# EAGLE board buttons (EAGLE 6.5.0)
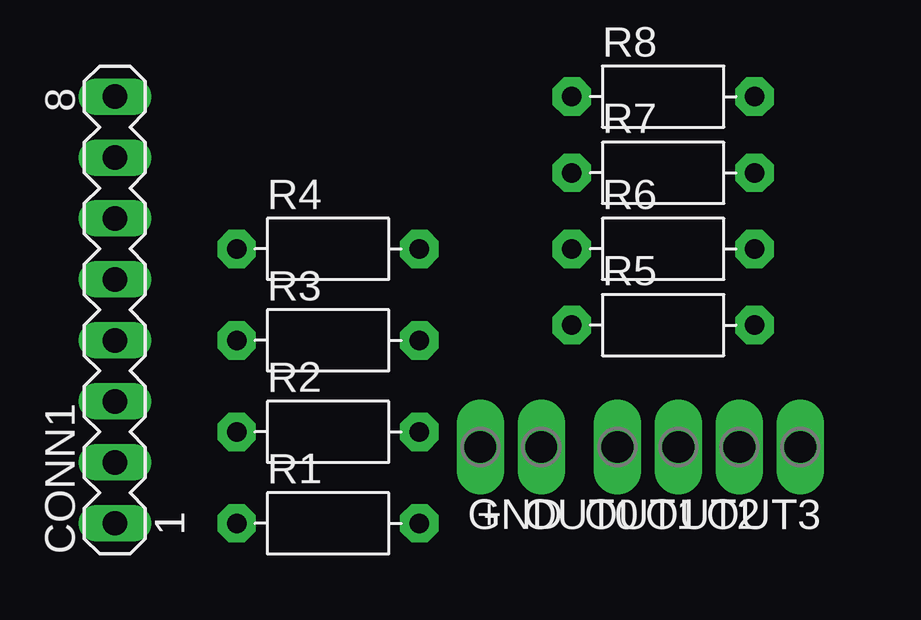
[diagram p0: board, top side]
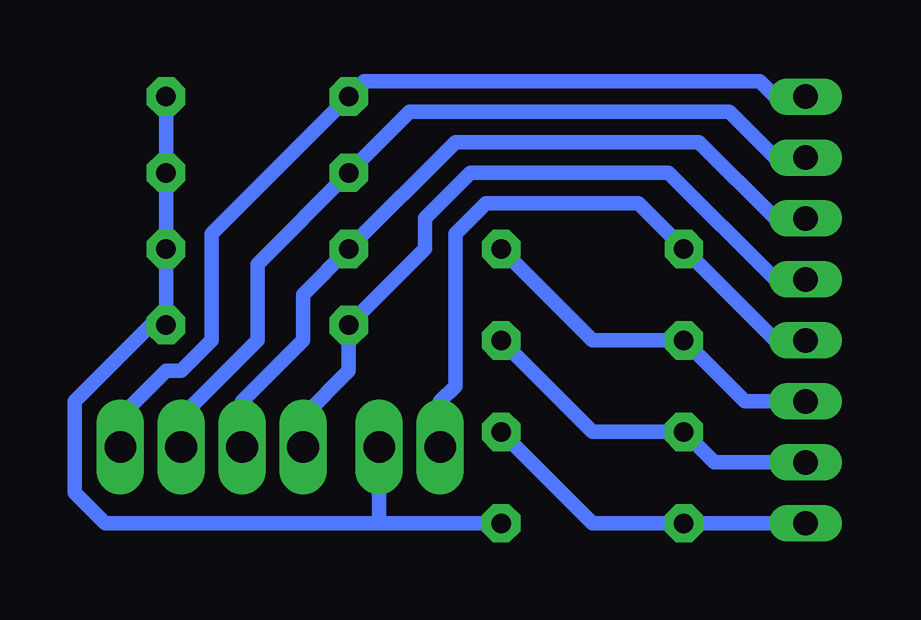
[diagram p1: board, bottom side, seen from below]

No outline drawn. Coordinates in mm, seen from the top.
Copper layers (1*16): Top 0.035mm / dielectric 1.5mm / Bottom 0.035mm
Design rules "default": minimum track width 10mil, minimum drill 24mil, track to track 8mil, track to pad 8mil, pad to pad 8mil, via to via 8mil, smd to smd 8mil, copper to edge 40mil, drill to drill 8mil, minimum pad ring 10mil, minimum via ring 8mil, stop-mask expansion 4mil, vias tented up to drill 0mil, thermal gap 10mil

## Footprints (pad centres in the part's own frame; a part is rotated, then mirrored left to right if it is on the bottom)
P1-13Y = drill 1.321 pad 1.905 long: TP 0,0
MA08-1 = drill 1.016 long: 1 -8.89,0; 2 -6.35,0; 3 -3.81,0; 4 -1.27,0; 5 1.27,0; 6 3.81,0; 7 6.35,0; 8 8.89,0
R-7,5 = drill 0.813 pad 1.6 octagon: 1 -3.81,0; 2 3.81,0

## Placement (x,y rotation side)
+  [P1-13Y]  17.78,5.71 180 top
CONN1  BUTTONS  [MA08-1]  2.54,11.43 90 top
GND  [P1-13Y]  20.32,5.71 180 top
OUT0  [P1-13Y]  23.5,5.71 180 top
OUT1  [P1-13Y]  26.04,5.71 180 top
OUT2  [P1-13Y]  28.57,5.71 180 top
OUT3  [P1-13Y]  31.11,5.71 180 top
R1  10k  [R-7,5]  11.43,2.54 0 top
R2  10k  [R-7,5]  11.43,6.35 0 top
R3  10k  [R-7,5]  11.43,10.16 0 top
R4  10k  [R-7,5]  11.43,13.97 0 top
R5  100k  [R-7,5]  25.4,10.79 0 top
R6  100k  [R-7,5]  25.4,13.97 0 top
R7  100k  [R-7,5]  25.4,17.14 0 top
R8  100k  [R-7,5]  25.4,20.32 0 top

## Library data of the parts
+ GND OUT0 OUT1-OUT3 = testpad
CONN1 = con-lstb
R1-R8 = discrete

## Nets
S$1: CONN1.1 R1.1 R2.2
S$2: CONN1.2 R2.1 R3.2
S$3: CONN1.3 R3.1 R4.2
S$4: +.TP CONN1.4 R4.1
S$6: GND.TP R1.2 R5.2 R6.2 R7.2 R8.2
S$7: CONN1.5 OUT0.TP R5.1
S$8: CONN1.6 OUT1.TP R6.1
S$9: CONN1.7 OUT2.TP R7.1
S$10: CONN1.8 OUT3.TP R8.1

## Tracks (layer width: path | path; a pad name or v marks a point on that pad's centre or on a via)
S$1
  Bottom 0.61: CONN1.1 R1.1 11.43,2.54 R2.2
S$2
  Bottom 0.61: CONN1.2 6.35,5.08 R2.1 11.43,6.35 R3.2
S$3
  Bottom 0.61: CONN1.3 5.08,7.62 R3.1 11.43,10.16 R4.2
S$4
  Bottom 0.61: CONN1.4 3.81,10.16 R4.1 9.53,15.88 15.88,15.88 17.14,14.61 17.14,8.26 17.78,7.62 +.TP
S$6
  Bottom 0.61: GND.TP 20.32,2.54 | 20.32,2.54 R1.2 | R8.2 R7.2 R6.2 R5.2 29.84,10.79 33.02,7.62 33.02,3.81 31.75,2.54 20.32,2.54
S$7
  Bottom 0.61: CONN1.5 3.81,12.7 8.26,17.14 16.51,17.14 18.41,15.24 18.41,13.97 R5.1 21.59,8.89 23.5,6.99 OUT0.TP
S$8
  Bottom 0.61: CONN1.6 3.81,15.24 6.99,18.41 17.14,18.41 R6.1 23.5,12.06 23.5,10.16 26.04,7.62 OUT1.TP
S$9
  Bottom 0.61: CONN1.7 3.81,17.78 5.71,19.68 19.05,19.68 R7.1 25.4,13.34 25.4,10.16 28.57,6.99 OUT2.TP
S$10
  Bottom 0.61: CONN1.8 3.81,20.32 4.45,20.95 20.95,20.95 R8.1 27.3,14.61 27.3,10.16 28.57,8.89 29.21,8.89 31.11,6.99 OUT3.TP